# Altium PCB Controlador de velocidad - Placa fuente.PcbDoc
Units mil, origin at the board's own origin, x right, y up, seen from the top; angles counter-clockwise.
Board outline 3356.49 x 1466.72 mil, 2 copper layers (Top Layer, Bottom Layer); 28 components, 19 nets, 81 pads, 4 vias.
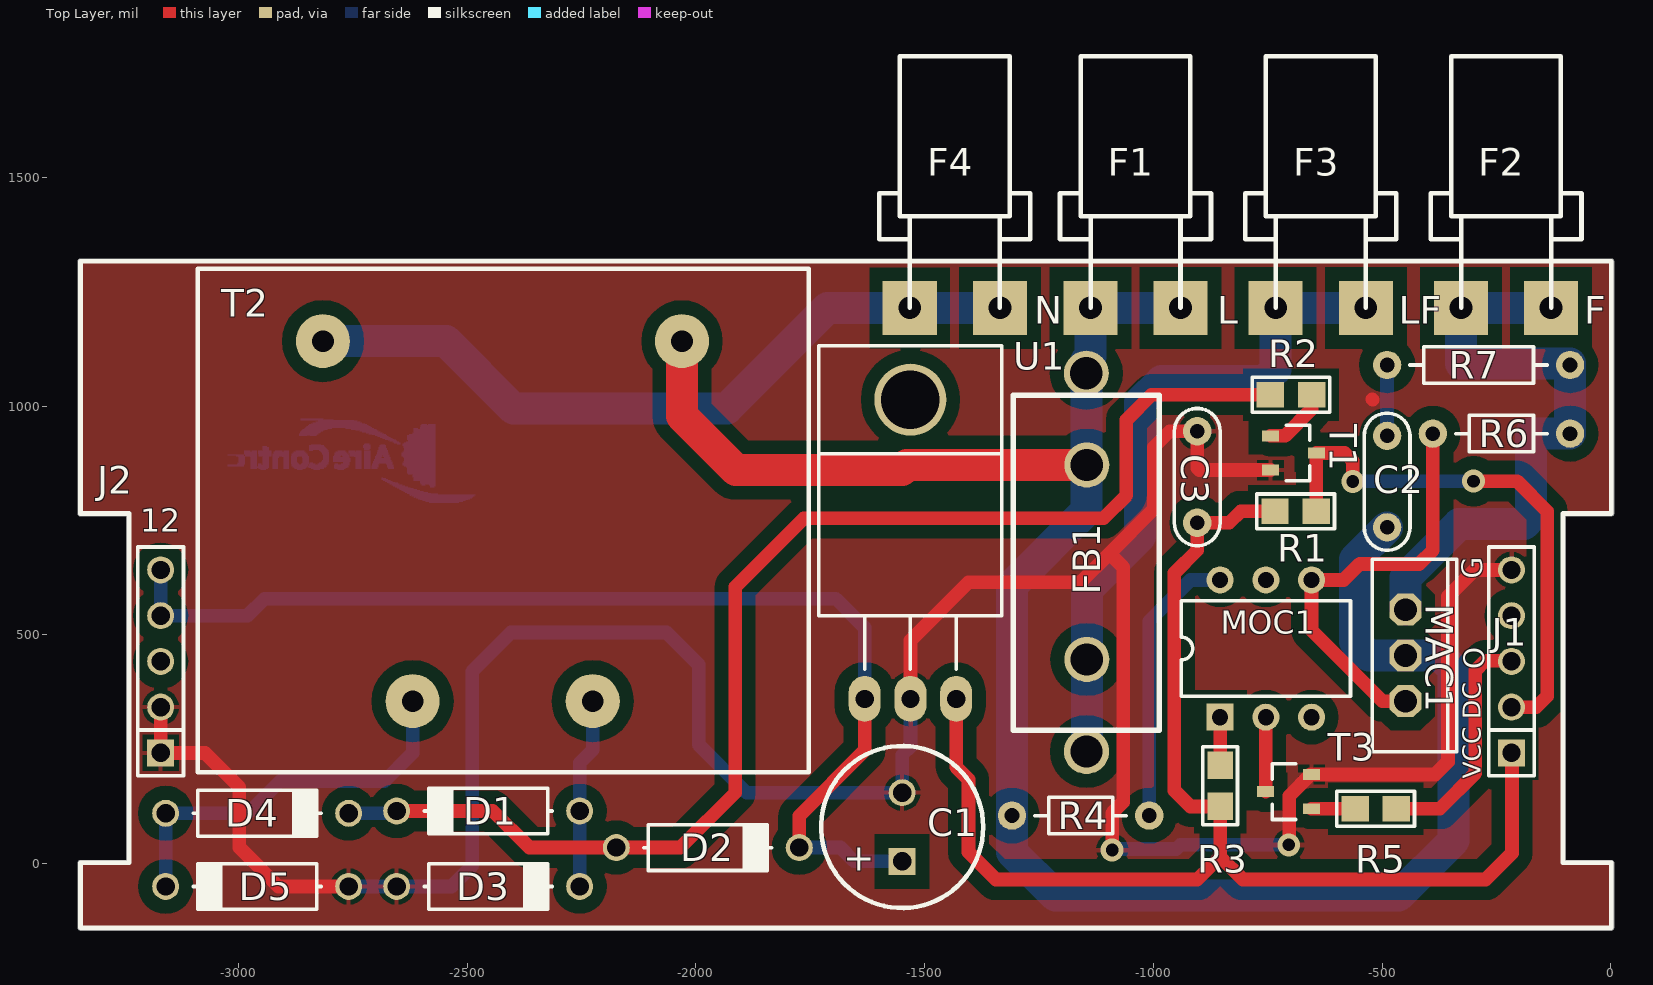
[diagram p0: Top Layer view]
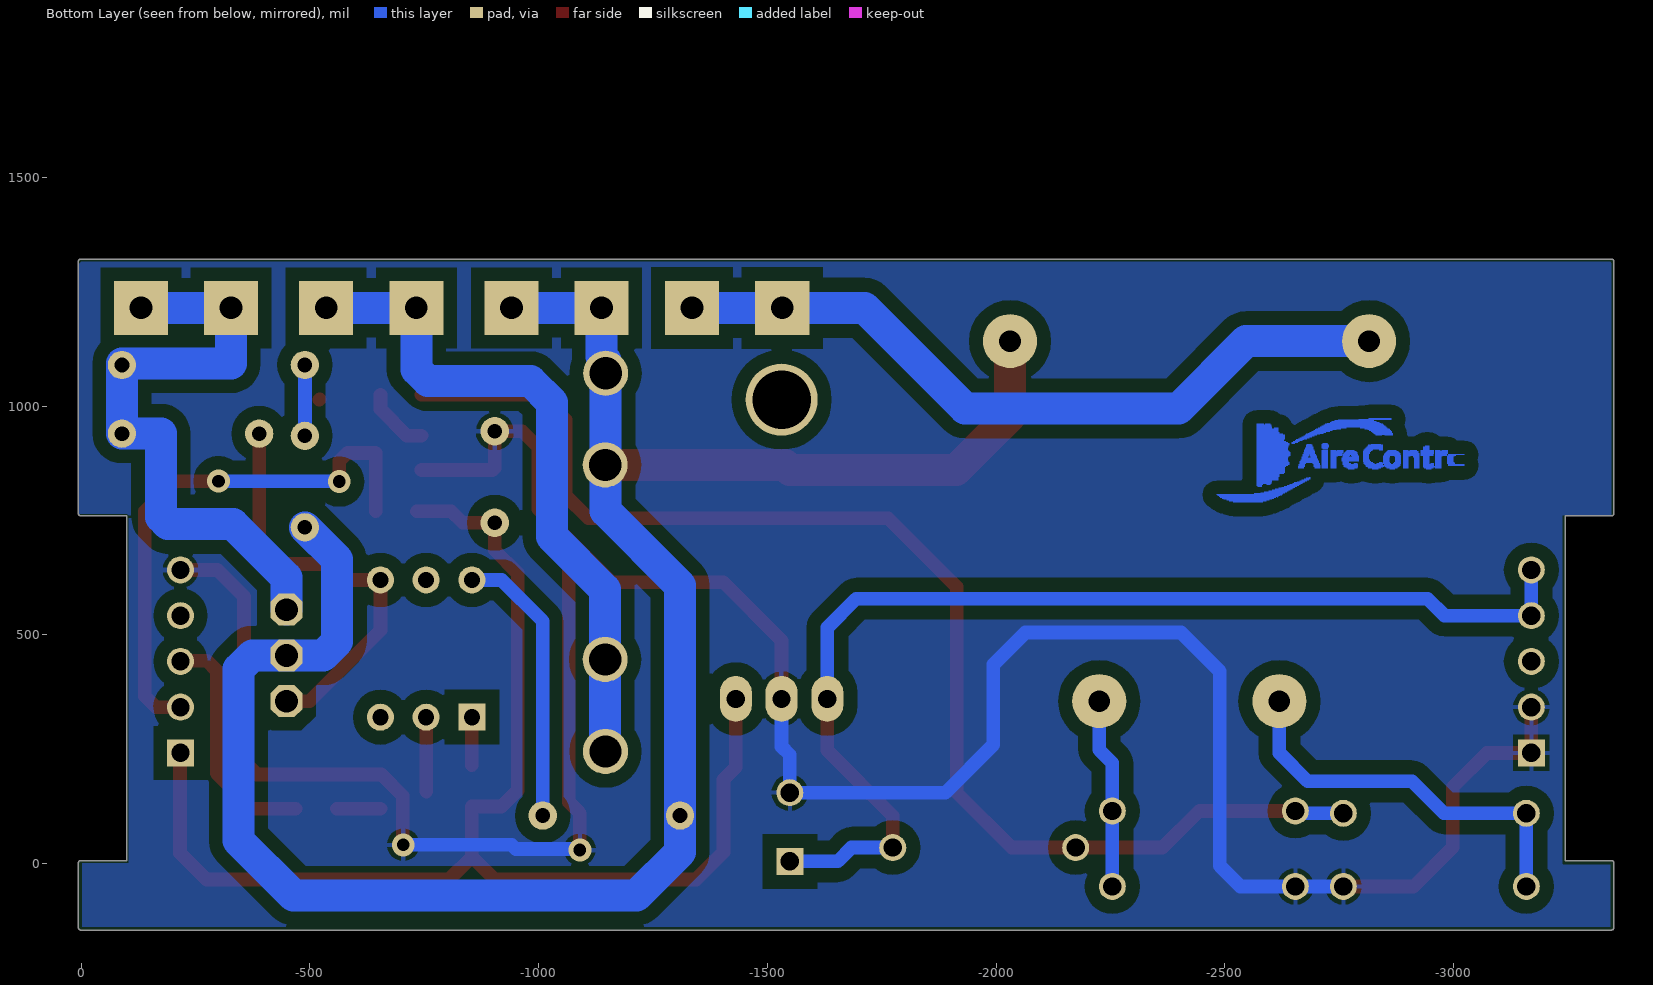
[diagram p1: Bottom Layer view, seen from below]

## Layer stack, top to bottom
Top Solder: solder mask 0.4, Solder Resist, Dk 3.5
Top Layer: signal copper 1.4
Dielectric 1: dielectric 12.6, FR-4, Dk 4.8
Bottom Layer: signal copper 1.4
Bottom Solder: solder mask 0.4, Solder Resist, Dk 3.5

## Board outline
-3345.25,-145.22 cw(c-3345.25,-140.21) -3350.26,-140.21 -3350.26,1.52 cw(c-3345.25,1.52) -3345.25,6.54 -3243.96,6.54 -3243.96,760.29 -3345.25,760.29 cw(c-3345.25,765.3) -3350.26,765.3 -3350.26,1316.48 cw(c-3345.25,1316.48) -3345.25,1321.5 1.21,1321.5 cw(c1.21,1316.48) 6.22,1316.48 6.22,765.3 cw(c1.21,765.3) 1.21,760.29 -100.08,760.29 -100.08,6.54 1.21,6.54 cw(c1.21,1.52) 6.22,1.52 6.22,-140.21 cw(c1.21,-140.21) 1.21,-145.22

## Design rules (kind name [scope] priority, off if disabled: settings)
Clearance GND [InPolygon] p1: gap=30
Clearance Clearance_1 [All] p2: gap=15
PolygonConnect [All] p1: connectstyle=Relief reliefconductorwidth=10 reliefentries=4 polygonreliefangle="90 Angle" airgapwidth=10
RoutingVias [All] p1: holewidth=28 width=50 viastyle="Through Hole" minholewidth=28 minwidth=50 maxholewidth=28 maxwidth=50
SolderMaskExpansion [All] p1: expansion=4
Width 220V [InNet('L','220V','N','NetF3_1','NetF2_1')] p1: maxlimit=70 minlimit=70 preferedwidth=70 minimp=50.000000 maximp=50.000000 favimp=50.000000
Width Width_1 [All] p2: maxlimit=30 minlimit=30 preferedwidth=30 minimp=50.000000 maximp=50.000000 favimp=50.000000
30 further rules are at their usual default settings.

## Components (designator, comment, footprint, x,y, rotation, side; value= is the part's Value field where it differs from the comment)
C1 "1000uF/25V" CAP300RP -1549,80 r90 top
C2 "0.01uF" CAP200 -489,835 r90 top
C3 "CAP" CAP200 -904,845 r270 top
D1 "DIODO" DO41 -2454,115 r180 top
D2 "DIODO" DO41 -1974,35 r0 top
D3 "DIODO" DO41 -2454,-50 r0 top
D4 "DIODO" DO41 -2959,110 r0 top
D5 "DIODO" DO41 -2959,-50 r180 top
F1 "Faston" Faston_V -1039,1415 r0 top (schematic designator F11)
F2 "Faston" Faston_V -229,1415 r0 top (schematic designator F11)
F3 "L" Faston_V -634,1415 r0 top (schematic designator F11)
F4 "N" Faston_V -1434,1415 r0 top (schematic designator F11)
FB1 "Fusible" Porta_fuse_2 -1146,245 r90 top
J1 "CON5" SIP5 -217,242 r90 top
J2 "CON5" SIP5 -3170,242 r90 top
MAC1 "MAC8x" TO-220_vert -449,555 r270 top (schematic designator MAC3)
MOC1 "MOC3023" 4N33 -854,320 r0 top (schematic designator MOC3)
R1 "10K" 0805 -689,770 r180 top
R2 "10K" 0805 -699,1025 r0 top
R3 "220" 0805 -854,170 r270 top
R4 "1k" RES300 -1309,105 r0 top
R5 "10k" 0805 -514,120 r180 top
R6 "220" RES300 -89,940 r180 top
R7 "120" RES400 -489,1090 r0 top
T1 "TRANSISTOR NPN" SOT23 -744,935 r270 top
T2 "UC30D-2-120018" Trafo_220_12_1 -1753,1300 r180 top (schematic designator T1)
T3 "TRANSISTOR NPN" SOT23 -654,120 r90 top (schematic designator T2)
U1 "7805" "TO-220 H" -1531,660 r0 top

## Footprints (in the part's own frame and the unit in brackets; to place one, negate y for a bottom-side part, rotate by r counter-clockwise, add the part's x,y. Pads: shape width x height; smd on the part's side, far side on the other; paste and mask are expansions set on the pad)
4N33 [mm]
  rect 1.5x1.5 hole 0.9: 1(0,0)
  round 1.5 hole 0.9: 2(2.54,0) 3(5.08,0) 4(5.08,7.62) 5(2.54,7.62) 6(0,7.62)
  silkscreen extent -2.16,1.16 7.24,6.46
0805 [mil] "Pasivo 0805"
  rect 60x56 smd: 1(-45,0) 2(45,0)
  silkscreen extent -85,-38 85,38, body extent -40,-25 39,25, height 15
CAP200 [mil]
  round 62 hole 32: 1(-100,0) 2(100,0)
  silkscreen extent -150,-50 150,50, body extent -110,-46 110,44, height 246
CAP300RP [mm]
  rect 1.5x1.5 hole 1.016: 1(-1.905,0)
  round 1.5 hole 1.016: 2(1.905,0)
  silkscreen extent -4.5,-4.5 4.5,4.5
DO41 [mm]
  round 1.5 hole 1.016: 1(-5.08,0) 2(5.08,0)
  silkscreen extent -3.56,-1.27 3.56,1.27, body extent -5.46,-1.19 5.46,1.37, height 2.03
Faston_V [mm]
  round 1.651 on Top Overlay: 0(0,6.223)
  rect 3x3 hole 1.27: 1(-2.501,-5.08) 2(2.501,-5.08)
  silkscreen extent -4.19,-5.08 4.19,8.89
Porta_fuse_2 [mm] "10"
  round 2.5 hole 1.8: 1(0.003,0.002) 2(21.003,0.012) 3(15.91,-0.02) 4(5.11,-0.02)
  silkscreen extent 1.19,-4.03 19.79,4.07
RES300 [mil]
  round 62 hole 32: 1(0,0) 2(300,0)
  silkscreen extent 50,-40 250,40, body extent -10,-38 310,38, height 79
RES400 [mil]
  round 62 hole 32: 1(0,0) 2(400,0)
  silkscreen extent 50,-40 350,40, body extent -12,-45 412,46, height 96
SIP5 [mm]
  rect 1.5x1.5 hole 1.016: 1(0,0)
  round 1.5 hole 1.016: 2(2.54,0) 3(5.08,0) 4(7.62,0) 5(10.16,0)
  silkscreen extent -1.27,-1.27 11.43,1.27, body extent -1.27,-1.27 11.43,1.27, height 8.38
SOT23 [mm]
  rect 0.6x0.95 smd: 1(0,0) 2(0.95,2.55) 3(1.9,0)
  silkscreen extent -0.6,0.87 2.5,2.17, body extent -0.53,-0.25 2.47,2.88, height 1
"TO-220 H" [mil]
  oval 70x100 hole 40: 1(-100,-300) 2(0,-300) 3(100,-300)
  round 157.48 hole 127.95: 4(0,354.33)
  silkscreen extent -200,-235 200,472, body extent -200,-308 200,452, height 175
TO-220_vert [mil]
  oct 70x70 hole 50: 1(0,0) 2(100,0) 3(200,0)
  silkscreen extent -111,-73 311,112
Trafo_220_12_1 [mm]
  round 3 hole 1.2: 1(26.98,4.01) 5(7.045,4.01) 7(12,24) 9(22,24)
  round 3 on Top Overlay: 6(7.02,23.95) 10(26.98,23.95)
  silkscreen extent 0.01,-0.02 33.92,27.95

## Part data
C1: library part CAPPOL
C2: library part CAP
F1 F2 F3 F4: library part FastonX1
FB1: library part Porta_fuse_1
R1 R2 R3 R4 R5 R6 R7: library part RES
T2: library part TRAFO_220_12_1
U1: library part 78XX, "REGULDOR POSITIVO"

## Via types
v1: diameter 50, hole 28, Top Layer to Bottom Layer, 4 vias

## Nets (pads, with @x,y where several pads share a name; then routed paths per layer and width w, separated by ;. In a path a pad name is that pad's centre, name@x,y a point inside that pad or via, vN(x,y) a via of type N, cw(c..) or ccw(c..) an arc to the next point about the centre after c; other vN are vias at no path point)
12V: C1.1 D2.2 J2.4 J2.5 U1.1 | length 2458.1
  Top Layer w30: D2.2 -1774,104 -1631,247 U1.1
  Bottom Layer w30: J2.5 J2.4 -2980,542 -2943,579 -1694,579 -1631,516 U1.1 ; D2.2 -1684,35 -1654,5 C1.1
DC0: J1.2 R1.1 T1.2 | length 1226.5
  Top Layer w30: R1.1@-643.61,770.39 T1.2 -581.6,897.6 -564,880 v1(-564,835) ; v1(-300,836) -205,836 -139,770 -139,366 -163,342 J1.2
  Bottom Layer w30: v1(-564,835) -559,840 -555,836 v1(-300,836) ; J1.2@-216,330 J1.2@-202.3,343.7
GND: C1.2 C3.1 D3.1 D5.1 J1.5 J2.1 J2.2 T1.3 T3.3 U1.2 | length 6191
  Top Layer w30: J2.2 J2.1 -3073,242 -2998,167 -2998,35 -2913,-50 D5.1 ; U1.2 -1531,488 -1404,615 -1159.15,615 -1096.07,678.07 ; v1(-1090,30) -1090,110.27 -1066,134.27 -1066,648 -1096.07,678.07 ; T1.3 -899.2,860.2 -904,865 C3.1 -964,945 -999,910 -999,775.15 -1096.07,678.07 ; v1@-703,41 -703,148 -656.2,194.8 T3.3 -384.2,194.8 -356,223 -356,584 -298,642 J1.5 ; -521.48,1015 -520.48,1014
  Bottom Layer w30: D5.1 D3.1 -2534,-50 -2489,-5 -2489,420 -2404,505 -2064,505 -1994,435 -1994,260 -1889,155 C1.2 -1549,238 -1531,256 U1.2 ; v1@-1087,32 -950,32 -941,41 v1(-704,41)
L: C2.1 F1.1 F1.2 FB1.2 FB1.3 MAC1.2 R4.1 T2.5 | length 4480.4
  Top Layer w70: T2.5 -2030.38,978.38 -1912.59,860.59 -1549.46,860.59 -1538.68,871.38 FB1.3@-1173.21,871.38
  Bottom Layer w70: F1.2 F1.1 -1137.46,1108.89 -1146.48,1099.88 -1146.48,770.52 -1309,608 -1309,25 -1214,-70 -464,-70 -344,50 -344,425 -374,455 MAC1.2 -529,455 -559.47,485.47 -559.47,664.53 C2.1
N: F4.1 F4.2 T2.1 | length 1631.7
  Bottom Layer w70: T2.1 -2546.13,1142.13 -2399,995 -1932.46,995 -1712.46,1215 F4.2
NetC2_2: C2.2 R7.1 | length 155
  Bottom Layer w30: C2.2 R7.1
NetD1_1: D1.1 D3.2 T2.7 | length 416.9
  Bottom Layer w30: D3.2 D1.1 -2254,220 -2225.44,248.56 T2.7
NetD1_2: D1.2 D2.1 D4.2 R2.1 | length 2818.5
  Top Layer w30: D1.2 -2444,115 -2364,35 D2.1 -2034,35 -1914,155 -1914,605 -1764,755 -1109,755 -1059,805 -1059,970 -1004,1025 R2.1
  Bottom Layer w30: D4.2 D1.2@-2654,110
NetD4_1: D4.1 D5.2 T2.9 | length 867.7
  Bottom Layer w30: D5.2 D4.1 -2979,110 -2909,180 -2681,180 -2619.14,241.86 T2.9
NetF2_1: F2.1 F2.2 MAC1.1 R6.1 R7.2 | length 1377.5
  Bottom Layer w70: MAC1.1 -449,625 -332,742 -190,742 -174,758 -174,940 R6.1 -89,1093.46 -327.46,1093.46 F2.1 F2.2
NetF3_1: F3.1 F3.2 FB1.1 FB1.4 | length 1468.1
  Bottom Layer w70: FB1.4 -1145.21,598.79 -1029,715 -1029,1008 -982.5,1054.5 -758.5,1054.5 -732.46,1080.54 F3.1 F3.2 ; FB1.1@-1145.09,247.11 FB1.4@-1145.09,447.31
NetMAC1_3: MAC1.3 MOC1.4 R6.2 | length 926.1
  Top Layer w30: MAC1.3 -499,355 -654,510 MOC1.4 -584,620 -549,655 -419,655 -389,685 R6.2
NetMOC1_1: MOC1.1 R3.1 | length 105
  Top Layer w30: R3.1 MOC1.1
NetMOC1_2: MOC1.2 T3.2 | length 162.8
  Top Layer w30: T3.2 -754.39,319.61 MOC1.2
NetMOC1_6: MOC1.6 R4.2 | length 617.3
  Bottom Layer w30: R4.2 -1009,530 -919,620 MOC1.6
NetR2_2: R2.2 T1.1 | length 145.8
  Top Layer w30: T1.1 -712.36,935 -654,993.36 R2.2
NetR5_2: R5.2 T3.1 | length 95
  Top Layer w30: T3.1 R5.2
OPTO: J1.3 R5.1 | length 524
  Top Layer w30: R5.1 -374,120 -296,198 -296,422 -274.3,443.7 -229.7,443.7 J1.3@-216,430
VCC: C3.2 J1.1 R1.2 R3.2 U1.3 | length 2855.7
  Top Layer w30: U1.3 -1431,211 -1404,184 -1404,25 -1344,-35 -904,-35 -854,15 ; R1.2 -809,770 -834,745 C3.2 -904,685 -954,635 -954,160 -919,125 R3.2 -854,15 ; J1.1@-216,243.7 -216,23 -274,-35 -804,-35 -854,15
pads on no net: F1.0 F2.0 F3.0 F4.0 J1.4 J2.3 MOC1.3 MOC1.5 T2.6 T2.10 U1.4
copper on no net: | length 23262
  Bottom Layer w1: -3023,870 -2988,870 ; -3023,871 -2988,871 ; -3023,872 -2988,872 ; -3023,894 -2988,894 ; -3005,892 -2988,892 ; -3005,893 -2988,893 ; -3003,873 -2988,873 ; -3003,874 -2986,874 ; -3001,875 -2986,875 ; -3001,876 -2986,876 ; -3001,890 -2986,890 ; -3001,891 -2988,891 ; -2999,877 -2986,877 ; -2999,878 -2986,878 ; -2999,879 -2986,879 ; -2999,880 -2986,880 ; -2999,881 -2986,881 ; -2999,882 -2986,882 ; -2999,883 -2986,883 ; -2999,884 -2986,884 ; -2999,885 -2986,885 ; -2999,886 -2986,886 ; -2999,887 -2986,887 ; -2999,888 -2986,888 ; -2999,889 -2986,889 ; -2987,896 -2960,896 ; -2987,897 -2960,897 ; -2987,898 -2960,898 ; -2987,899 -2960,899 ; -2987,900 -2960,900 ; -2987,901 -2974,901 ; -2987,902 -2974,902 ; -2985,892 -2960,892 ; -2985,893 -2960,893 ; -2985,894 -2960,894 ; -2985,895 -2960,895 ; -2975,890 -2960,890 ; -2975,891 -2960,891 ; -2973,864 -2960,864 ; -2973,865 -2960,865 ; -2973,866 -2960,866 ; -2973,867 -2960,867 ; -2973,868 -2960,868 ; -2973,869 -2960,869 ; -2973,870 -2960,870 ; -2973,871 -2960,871 ; -2973,872 -2960,872 ; -2973,873 -2960,873 ; -2973,874 -2960,874 ; -2973,875 -2960,875 ; -2973,876 -2960,876 ; -2973,877 -2960,877 ; -2973,878 -2960,878 ; -2973,879 -2960,879 ; -2973,880 -2960,880 ; -2973,881 -2960,881 ; -2973,882 -2960,882 ; -2973,883 -2960,883 ; -2973,884 -2960,884 ; -2973,885 -2960,885 ; -2973,886 -2960,886 ; -2973,887 -2960,887 ; -2973,888 -2960,888 ; -2973,889 -2960,889 ; -2971,901 -2960,901 ; -2971,902 -2960,902 ; -2959,866 -2934,866 ; -2959,867 -2934,867 ; -2959,868 -2934,868 ; -2957,869 -2934,869 ; -2957,870 -2934,870 ; -2957,871 -2934,871 ; -2957,872 -2934,872 ; -2957,873 -2950,873 ; -2957,874 -2950,874 ; -2957,896 -2928,896 ; -2957,897 -2928,897 ; -2957,898 -2928,898 ; -2957,899 -2928,899 ; -2957,900 -2928,900 ; -2957,901 -2928,901 ; -2957,902 -2928,902 ; -2955,864 -2936,864 ; -2955,865 -2936,865 ; -2955,892 -2928,892 ; -2955,893 -2928,893 ; -2955,894 -2928,894 ; -2955,895 -2928,895 ; -2951,862 -2940,862 ; -2951,863 -2940,863 ; -2947,873 -2934,873 ; -2947,874 -2934,874 ; -2947,875 -2934,875 ; -2947,876 -2934,876 ; -2947,877 -2934,877 ; -2947,878 -2934,878 ; -2947,879 -2934,879 ; -2947,880 -2934,880 ; -2947,881 -2934,881 ; -2947,882 -2934,882 ; -2947,883 -2934,883 ; -2947,884 -2934,884 ; -2947,885 -2934,885 ; -2947,886 -2934,886 ; -2947,887 -2934,887 ; -2947,888 -2934,888 ; -2947,889 -2934,889 ; -2947,890 -2934,890 ; -2947,891 -2934,891 ; -2947,903 -2934,903 ; -2947,904 -2934,904 ; -2947,905 -2934,905 ; -2947,906 -2934,906 ; -2947,907 -2934,907 ; -2947,908 -2934,908 ; -2947,909 -2934,909 ; -2947,910 -2934,910 ; -2947,911 -2938,911 ; -2947,912 -2938,912 ; -2925,864 -2914,864 ; -2925,865 -2914,865 ; -2925,866 -2914,866 ; -2925,867 -2914,867 ; -2925,868 -2914,868 ; -2925,869 -2914,869 ; -2925,870 -2914,870 ; -2925,871 -2914,871 ; -2925,872 -2914,872 ; -2925,873 -2914,873 ; -2925,874 -2914,874 ; -2925,875 -2914,875 ; -2925,876 -2914,876 ; -2925,877 -2914,877 ; -2925,878 -2914,878 ; -2925,879 -2914,879 ; -2925,880 -2914,880 ; -2925,881 -2914,881 ; -2925,882 -2914,882 ; -2925,883 -2914,883 ; -2925,884 -2914,884 ; -2925,885 -2914,885 ; -2925,886 -2914,886 ; -2925,887 -2914,887 ; -2925,888 -2912,888 ; -2925,889 -2912,889 ; -2925,890 -2912,890 ; -2925,891 -2912,891 ; -2925,892 -2890,892 ; -2925,893 -2890,893 ; -2925,894 -2890,894 ; -2925,895 -2890,895 ; -2925,896 -2890,896 ; -2923,897 -2890,897 ; -2923,898 -2890,898 ; -2923,899 -2890,899 ; -2923,900 -2890,900 ; -2919,901 -2904,901 ; -2919,902 -2904,902 ; -2905,890 -2890,890 ; -2905,891 -2890,891 ; -2901,864 -2890,864 ; -2901,865 -2890,865 ; -2901,866 -2890,866 ; -2901,867 -2890,867 ; -2901,868 -2890,868 ; -2901,869 -2890,869 ; -2901,870 -2890,870 ; -2901,871 -2890,871 ; -2901,872 -2890,872 ; -2901,873 -2890,873 ; -2901,874 -2890,874 ; -2901,875 -2890,875 ; -2901,876 -2890,876 ; -2901,877 -2890,877 ; -2901,878 -2890,878 ; -2901,879 -2890,879 ; -2901,880 -2890,880 ; -2901,881 -2890,881 ; -2901,882 -2890,882 ; -2901,883 -2890,883 ; -2901,884 -2890,884 ; -2901,885 -2890,885 ; -2901,886 -2890,886 ; -2901,887 -2890,887 ; -2901,888 -2890,888 ; -2901,889 -2890,889 ; -2901,901 -2890,901 ; -2901,902 -2890,902 ; -2885,874 -2868,874 ; -2885,875 -2870,875 ; -2885,876 -2870,876 ; -2885,877 -2872,877 ; -2885,878 -2872,878 ; -2885,879 -2872,879 ; -2885,880 -2872,880 ; -2885,881 -2872,881 ; -2885,882 -2872,882 ; -2885,883 -2872,883 ; -2885,884 -2872,884 ; -2885,885 -2872,885 ; -2885,886 -2872,886 ; -2885,887 -2872,887 ; -2885,888 -2872,888 ; -2885,889 -2872,889 ; -2885,890 -2870,890 ; -2885,891 -2870,891 ; -2885,892 -2866,892 ; -2883,870 -2848,870 ; -2883,871 -2848,871 ; -2883,872 -2848,872 ; -2883,873 -2868,873 ; -2883,893 -2866,893 ; -2883,894 -2848,894 ; -2883,895 -2850,895 ; -2883,896 -2850,896 ; -2881,868 -2850,868 ; -2881,869 -2850,869 ; -2881,897 -2852,897 ; -2881,898 -2852,898 ; -2879,866 -2852,866 ; -2879,867 -2852,867 ; -2879,899 -2854,899 ; -2879,900 -2854,900 ; -2877,864 -2854,864 ; -2877,865 -2854,865 ; -2875,901 -2856,901 ; -2875,902 -2856,902 ; -2871,862 -2860,862 ; -2871,863 -2860,863 ; -2867,936 -2850,936 ; -2867,937 -2830,937 ; -2867,938 -2828,938 ; -2867,939 -2828,939 ; -2867,940 -2826,940 ; -2865,892 -2848,892 ; -2865,893 -2848,893 ; -2865,941 -2826,941 ; -2865,942 -2823,942 ; -2865,943 -2822,943 ; -2865,944 -2820,944 ; -2863.38,970 -2792.38,970 ; -2863.38,971 -2814.38,971 ; -2863.38,972 -2814.38,972 ; -2863,873 -2848,873 ; -2863,874 -2846,874 ; -2863,945 -2820,945 ; -2863,946 -2816,946 ; -2861,875 -2846,875 ; -2861,876 -2846,876 ; -2861,888 -2846,888 ; -2861,889 -2846,889 ; -2861,890 -2846,890 ; -2861,891 -2848,891 ; -2861,947 -2816,947 ; -2861,948 -2812,948 ; -2859,877 -2846,877 ; -2859,878 -2846,878 ; -2859,879 -2846,879 ; -2859,880 -2846,880 ; -2859,881 -2846,881 ; -2859,882 -2846,882 ; -2859,883 -2846,883 ; -2859,884 -2846,884 ; -2859,885 -2846,885 ; -2859,886 -2846,886 ; -2859,887 -2846,887 ; -2859,949 -2812,949 ; -2859,950 -2806,950 ; -2855,951 -2806,951 ; -2855,952 -2796,952 ; -2853,953 -2796,953 ; -2853,954 -2708,954 ; -2851,955 -2712,955 ; -2851,956 -2712,956 ; -2847,868 -2809,868 ; -2847,869 -2808,869 ; -2847,870 -2808,870 ; -2847,957 -2716,957 ; -2847,958 -2716,958 ; -2845,866 -2812,866 ; -2845,867 -2812,867 ; -2845,871 -2808,871 ; -2845,872 -2806,872 ; -2845,873 -2832,873 ; -2845,874 -2832,874 ; -2845,904 -2838,904 ; -2845,905 -2838,905 ; -2845,906 -2806,906 ; -2845,907 -2808,907 ; -2845,908 -2808,908 ; -2845,909 -2810,909 ; -2845,910 -2810,910 ; -2845,911 -2812,911 ; -2845,912 -2812,912 ; -2845,913 -2814,913 ; -2845,914 -2814,914 ; -2845,959 -2720,959 ; -2845,960 -2720,960 ; -2844,875 -2838,875 ; -2844,876 -2838,876 ; -2843,936 -2840,936 ; -2841,864 -2814,864 ; -2841,865 -2814,865 ; -2841,915 -2820,915 ; -2841,916 -2820,916 ; -2841,961 -2724,961 ; -2841,962 -2724,962 ; -2839,936 -2830,936 ; -2837,963 -2730,963 ; -2837,964 -2730,964 ; -2835,862 -2822,862 ; -2835,863 -2822,863 ; -2831,965 -2734,965 ; -2831,966 -2734,966 ; -2827,873 -2806,873 ; -2827,874 -2804,874 ; -2825,967 -2740,967 ; -2825,968 -2740,968 ; -2823,875 -2804,875 ; -2823,876 -2804,876 ; -2823,904 -2804,904 ; -2823,905 -2806,905 ; -2821,902 -2804,902 ; -2821,903 -2804,903 ; -2819,877 -2804,877 ; -2819,878 -2802,878 ; -2819,900 -2802,900 ; -2819,901 -2804,901 ; -2819,969 -2748,969 ; -2817,879 -2802,879 ; -2817,880 -2802,880 ; -2817,881 -2802,881 ; -2817,882 -2802,882 ; -2817,896 -2802,896 ; -2817,897 -2802,897 ; -2817,898 -2802,898 ; -2817,899 -2802,899 ; -2815,883 -2802,883 ; -2815,884 -2802,884 ; -2815,885 -2802,885 ; -2815,886 -2802,886 ; -2815,887 -2802,887 ; -2815,888 -2802,888 ; -2815,889 -2802,889 ; -2815,890 -2802,890 ; -2815,891 -2802,891 ; -2815,892 -2802,892 ; -2815,893 -2802,893 ; -2815,894 -2802,894 ; -2815,895 -2802,895 ; -2793,880 -2756,880 ; -2793,881 -2756,881 ; -2793,882 -2756,882 ; -2793,883 -2756,883 ; -2793,884 -2756,884 ; -2793,885 -2756,885 ; -2793,886 -2756,886 ; -2793,887 -2758,887 ; -2793,888 -2758,888 ; -2793,889 -2780,889 ; -2793,890 -2778,890 ; -2791,866 -2762,866 ; -2791,867 -2762,867 ; -2791,868 -2760,868 ; -2791,869 -2760,869 ; -2791,870 -2760,870 ; -2791,871 -2760,871 ; -2791,872 -2758,872 ; -2791,891 -2778,891 ; -2791,892 -2776,892 ; -2791,893 -2776,893 ; -2791,894 -2759,894 ; -2789,864 -2766,864 ; -2789,865 -2766,865 ; -2789,873 -2782,873 ; -2789,874 -2783,874 ; -2789,895 -2760,895 ; -2789,896 -2760,896 ; -2789,897 -2762,897 ; -2789,898 -2762,898 ; -2787,899 -2764,899 ; -2787,900 -2764,900 ; -2783,862 -2770,862 ; -2783,863 -2770,863 ; -2783,901 -2766,901 ; -2783,902 -2766,902 ; -2775,873 -2758,873 ; -2775,874 -2758,874 ; -2773,892 -2758,892 ; -2773,893 -2758,893 ; -2771,875 -2758,875 ; -2771,876 -2758,876 ; -2771,877 -2758,877 ; -2771,878 -2758,878 ; -2771,890 -2758,890 ; -2771,891 -2758,891 ; -2769,879 -2758,879 ; -2769,889 -2758,889 ; -2765,952 -2704,952 ; -2765,953 -2708,953 ; -2759,898 -2732,898 ; -2759,899 -2732,899 ; -2759,900 -2732,900 ; -2759,901 -2746,901 ; -2759,902 -2746,902 ; -2757,894 -2732,894 ; -2757,895 -2732,895 ; -2757,896 -2732,896 ; -2757,897 -2732,897 ; -2755,892 -2732,892 ; -2755,893 -2732,893 ; -2753,950 -2701,950 ; -2753,951 -2704,951 ; -2747,890 -2732,890 ; -2747,891 -2732,891 ; -2743,864 -2732,864 ; -2743,865 -2732,865 ; -2743,866 -2732,866 ; -2743,867 -2732,867 ; -2743,868 -2732,868 ; -2743,869 -2732,869 ; -2743,870 -2732,870 ; -2743,871 -2732,871 ; -2743,872 -2732,872 ; -2743,873 -2732,873 ; -2743,874 -2732,874 ; -2743,875 -2732,875 ; -2743,876 -2732,876 ; -2743,877 -2732,877 ; -2743,878 -2732,878 ; -2743,879 -2732,879 ; -2743,880 -2732,880 ; -2743,881 -2732,881 ; -2743,882 -2732,882 ; -2743,883 -2732,883 ; -2743,884 -2732,884 ; -2743,885 -2732,885 ; -2743,886 -2732,886 ; -2743,887 -2732,887 ; -2743,888 -2732,888 ; -2743,889 -2732,889 ; -2743,901 -2732,901 ; -2743,902 -2732,902 ; -2743,948 -2698,948 ; -2743,949 -2700,949 ; -2735,946 -2694,946 ; -2735,947 -2698,947 ; -2729,944 -2690,944 ; -2729,945 -2694,945 ; -2727,910 -2712,910 ; -2727,911 -2712,911 ; -2727,912 -2712,912 ; -2727,913 -2712,913 ; -2727,914 -2712,914 ; -2725,864 -2712,864 ; -2725,865 -2712,865 ; -2725,866 -2712,866 ; -2725,867 -2712,867 ; -2725,868 -2712,868 ; -2725,869 -2712,869 ; -2725,870 -2712,870 ; -2725,871 -2712,871 ; -2725,872 -2712,872 ; -2725,873 -2712,873 ; -2725,874 -2712,874 ; -2725,875 -2712,875 ; -2725,876 -2712,876 ; -2725,877 -2712,877 ; -2725,878 -2712,878 ; -2725,879 -2712,879 ; -2725,880 -2712,880 ; -2725,881 -2712,881 ; -2725,882 -2712,882 ; -2725,883 -2712,883 ; -2725,884 -2712,884 ; -2725,885 -2712,885 ; -2725,886 -2712,886 ; -2725,887 -2712,887 ; -2725,888 -2712,888 ; -2725,889 -2712,889 ; -2725,890 -2712,890 ; -2725,891 -2712,891 ; -2725,892 -2712,892 ; -2725,893 -2712,893 ; -2725,894 -2712,894 ; -2725,895 -2712,895 ; -2725,896 -2712,896 ; -2725,897 -2712,897 ; -2725,898 -2712,898 ; -2725,899 -2712,899 ; -2725,900 -2712,900 ; -2725,901 -2712,901 ; -2725,902 -2712,902 ; -2725,906 -2714,906 ; -2725,907 -2714,907 ; -2725,908 -2712,908 ; -2725,909 -2712,909 ; -2725,915 -2712,915 ; -2725,916 -2712,916 ; -2725,917 -2714,917 ; -2724,918 -2714,918 ; -2721,942 -2686,942 ; -2721,943 -2690,943 ; -2715,940 -2682,940 ; -2715,941 -2686,941 ; -2709,864 -2696,864 ; -2709,865 -2696,865 ; -2709,866 -2696,866 ; -2709,867 -2696,867 ; -2709,868 -2694,868 ; -2709,869 -2694,869 ; -2709,870 -2694,870 ; -2707,871 -2694,871 ; -2707,872 -2694,872 ; -2707,873 -2694,873 ; -2707,874 -2692,874 ; -2707,938 -2678,938 ; -2707,939 -2682,939 ; -2705,875 -2692,875 ; -2705,876 -2664,876 ; -2705,877 -2664,877 ; -2705,878 -2664,878 ; -2705,879 -2666,879 ; -2705,880 -2666,880 ; -2703,881 -2666,881 ; -2703,882 -2666,882 ; -2703,883 -2668,883 ; -2703,884 -2668,884 ; -2701,885 -2668,885 ; -2701,886 -2668,886 ; -2701,887 -2688,887 ; -2701,888 -2688,888 ; -2701,889 -2688,889 ; -2701,890 -2686,890 ; -2701,936 -2676,936 ; -2701,937 -2678,937 ; -2699,891 -2686,891 ; -2699,892 -2686,892 ; -2699,893 -2686,893 ; -2699,894 -2686,894 ; -2697,895 -2686,895 ; -2697,896 -2672,896 ; -2697,897 -2672,897 ; -2697,898 -2672,898 ; -2697,899 -2674,899 ; -2697,900 -2674,900 ; -2695,901 -2674,901 ; -2695,902 -2674,902 ; -2695,903 -2674,903 ; -2695,904 -2674,904 ; -2695,934 -2672,934 ; -2695,935 -2676,935 ; -2693,905 -2676,905 ; -2693,906 -2676,906 ; -2693,907 -2676,907 ; -2693,908 -2676,908 ; -2693,909 -2678,909 ; -2693,910 -2678,910 ; -2691,911 -2678,911 ; -2691,912 -2678,912 ; -2691,913 -2678,913 ; -2691,914 -2678,914 ; -2690,932 -2668,932 ; -2690,933 -2672,933 ; -2689,915 -2680,915 ; -2689,916 -2680,916 ; -2687,840 -2674,840 ; -2687,841 -2678,841 ; -2687,842 -2678,842 ; -2687,843 -2684,843 ; -2687,844 -2684,844 ; -2685,930 -2664,930 ; -2685,931 -2668,931 ; -2684,895 -2672,895 ; -2683,838 -2668,838 ; -2683,839 -2674,839 ; -2683,890 -2670,890 ; -2683,891 -2670,891 ; -2683,892 -2670,892 ; -2683,893 -2670,893 ; -2683,894 -2670,894 ; -2681,887 -2668,887 ; -2681,888 -2668,888 ; -2681,889 -2670,889 ; -2679,836 -2664,836 ; -2679,837 -2668,837 ; -2679,928 -2660,928 ; -2679,929 -2664,929 ; -2677,874 -2664,874 ; -2677,875 -2664,875 ; -2675,834 -2658,834 ; -2675,835 -2664,835 ; -2675,868 -2660,868 ; -2675,869 -2662,869 ; -2675,870 -2662,870 ; -2675,871 -2662,871 ; -2675,872 -2662,872 ; -2675,873 -2664,873 ; -2673,864 -2660,864 ; -2673,865 -2660,865 ; -2673,866 -2660,866 ; -2673,867 -2660,867 ; -2673,926 -2656,926 ; -2673,927 -2660,927 ; -2671,832 -2652,832 ; -2671,833 -2658,833 ; -2669,830 -2648,830 ; -2669,831 -2652,831 ; -2669,924 -2654,924 ; -2669,925 -2656,925 ; -2665,828 -2642,828 ; -2665,829 -2648,829 ; -2663,922 -2650,922 ; -2663,923 -2654,923 ; -2661,826 -2636,826 ; -2661,827 -2642,827 ; -2659,920 -2646,920 ; -2659,921 -2650,921 ; -2657,824 -2630,824 ; -2657,825 -2636,825 ; -2653,822 -2624,822 ; -2653,823 -2630,823 ; -2653,918 -2646,918 ; -2653,919 -2646,919 ; -2649,820 -2618,820 ; -2649,821 -2624,821 ; -2647,818 -2610,818 ; -2647,819 -2618,819 ; -2643,816 -2604,816 ; -2643,817 -2610,817 ; -2643,892 -2570,892 ; -2643,893 -2570,893 ; -2643,894 -2570,894 ; -2643,895 -2570,895 ; -2643,896 -2570,896 ; -2643,897 -2570,897 ; -2643,898 -2570,898 ; -2641,872 -2570,872 ; -2641,873 -2570,873 ; -2641,874 -2570,874 ; -2641,875 -2570,875 ; -2641,876 -2570,876 ; -2641,890 -2570,890 ; -2641,891 -2570,891 ; -2641,899 -2570,899 ; -2641,900 -2570,900 ; -2641,914 -2570,914 ; -2641,915 -2570,915 ; -2641,916 -2570,916 ; -2641,917 -2570,917 ; -2641,918 -2570,918 ; -2639,814 -2596,814 ; -2639,815 -2604,815 ; -2639,877 -2570,877 ; -2639,878 -2570,878 ; -2639,879 -2570,879 ; -2639,880 -2570,880 ; -2639,888 -2570,888 ; -2639,889 -2570,889 ; -2639,901 -2570,901 ; -2639,902 -2570,902 ; -2639,910 -2570,910 ; -2639,911 -2570,911 ; -2639,912 -2570,912 ; -2639,913 -2570,913 ; -2637,870 -2570,870 ; -2637,871 -2570,871 ; -2637,881 -2570,881 ; -2637,882 -2570,882 ; -2637,883 -2570,883 ; -2637,884 -2570,884 ; -2637,886 -2570,886 ; -2637,887 -2570,887 ; -2637,903 -2570,903 ; -2637,904 -2570,904 ; -2637,906 -2570,906 ; -2637,907 -2570,907 ; -2637,908 -2570,908 ; -2637,909 -2570,909 ; -2637,919 -2570,919 ; -2637,920 -2570,920 ; -2635,812 -2586,812 ; -2635,813 -2596,813 ; -2635,885 -2570,885 ; -2635,905 -2570,905 ; -2633,868 -2570,868 ; -2633,869 -2570,869 ; -2633,921 -2570,921 ; -2633,922 -2570,922 ; -2631,810 -2578,810 ; -2631,811 -2586,811 ; -2631,854 -2570,854 ; -2631,855 -2570,855 ; -2631,856 -2570,856 ; -2631,857 -2570,857 ; -2631,858 -2570,858 ; -2631,859 -2570,859 ; -2631,860 -2570,860 ; -2631,861 -2570,861 ; -2631,862 -2570,862 ; -2631,863 -2570,863 ; -2631,864 -2570,864 ; -2631,866 -2570,866 ; -2631,867 -2570,867 ; -2631,928 -2570,928 ; -2631,929 -2570,929 ; -2631,930 -2570,930 ; -2631,931 -2570,931 ; -2631,932 -2570,932 ; -2631,933 -2570,933 ; -2631,934 -2570,934 ; -2631,935 -2570,935 ; -2631,936 -2570,936 ; -2629,852 -2570,852 ; -2629,853 -2570,853 ; -2629,865 -2570,865 ; -2629,923 -2570,923 ; -2629,924 -2570,924 ; -2629,925 -2570,925 ; -2629,926 -2570,926 ; -2629,927 -2570,927 ; -2627,808 -2564,808 ; -2627,809 -2578,809 ; -2627,937 -2570,937 ; -2627,938 -2570,938 ; -2625,806 -2482,806 ; -2624,805 -2623,805 ; -2623,807 -2564,807 ; -2621,804 -2484,804 ; -2621,805 -2484,805 ; -2619,846 -2570,846 ; -2619,847 -2570,847 ; -2619,848 -2570,848 ; -2619,849 -2570,849 ; -2619,850 -2570,850 ; -2619,851 -2570,851 ; -2619,939 -2570,939 ; -2619,940 -2570,940 ; -2619,941 -2570,941 ; -2619,942 -2570,942 ; -2617,802 -2488,802 ; -2617,803 -2488,803 ; -2617,838 -2570,838 ; -2617,839 -2570,839 ; -2617,840 -2570,840 ; -2617,841 -2570,841 ; -2617,842 -2570,842 ; -2617,843 -2570,843 ; -2617,844 -2570,844 ; -2617,845 -2570,845 ; -2617,943 -2570,943 ; -2617,944 -2570,944 ; -2617,945 -2570,945 ; -2617,946 -2570,946 ; -2617,947 -2570,947 ; -2617,948 -2570,948 ; -2617,949 -2570,949 ; -2617,950 -2570,950 ; -2617,951 -2608,951 ; -2617,952 -2608,952 ; -2616,801 -2615,801 ; -2611,800 -2490,800 ; -2611,801 -2490,801 ; -2607,798 -2494,798 ; -2607,799 -2494,799 ; -2603,796 -2498,796 ; -2603,797 -2498,797 ; -2603,834 -2570,834 ; -2603,835 -2570,835 ; -2603,836 -2570,836 ; -2603,837 -2570,837 ; -2603,951 -2570,951 ; -2603,952 -2570,952 ; -2603,953 -2570,953 ; -2603,954 -2570,954 ; -2601,830 -2586,830 ; -2601,831 -2586,831 ; -2601,832 -2570,832 ; -2601,833 -2570,833 ; -2601,955 -2570,955 ; -2601,956 -2570,956 ; -2601,957 -2570,957 ; -2601,958 -2570,958 ; -2599,828 -2592,828 ; -2599,829 -2592,829 ; -2599,959 -2588,959 ; -2599,960 -2588,960 ; -2597,794 -2504,794 ; -2597,795 -2504,795 ; -2591,792 -2510,792 ; -2591,793 -2510,793 ; -2585,830 -2570,830 ; -2585,831 -2570,831 ; -2585,959 -2570,959 ; -2585,960 -2570,960 ; -2583,790 -2518,790 ; -2583,791 -2518,791 ; -2583,828 -2570,828 ; -2583,829 -2570,829 ; -2581,824 -2572,824 ; -2581,825 -2572,825 ; -2581,826 -2570,826 ; -2581,827 -2570,827

## Polygon pours and split planes (outlines as drawn)
GND on Top Layer "Bottom Layer-No Net" (solid, remove dead copper, pour order 4): -3344,1314 -1,1314 0,1313 5.63,1307.37 5.63,763.3 -100.7,763.3 -105,759 -105,-1 -3,-1 -3,-140 -3346,-140 -3347,-141 -3344,-138 -3344,-4 -3241,-4 -3239,-2 -3239,760 -3346.84,760 -3348.17,758.67 -3346,760.84 -3346,1310
GND on Bottom Layer "Bottom Layer-No Net" (solid, remove dead copper, pour order 3): -3343,1316 0,1316 1,1315 6.63,1309.37 6.63,765.3 -99.7,765.3 -104,761 -104,1 -2,1 -2,-138 -3345,-138 -3346,-139 -3343,-136 -3343,-2 -3240,-2 -3238,0 -3238,762 -3345.84,762 -3347.17,760.67 -3345,762.84 -3345,1312

## Silkscreen, mask and mechanical layers (free items; w line width, h text height)
Top Overlay:
  lines w10: -3345.25,-140.21 -3345.25,1.52 -3238.95,1.52 -3238.95,765.3 -3345.25,765.3 -3345.25,1316.48 1.21,1316.48 1.21,765.3 -105.09,765.3 -105.09,1.52 1.21,1.52 1.21,-140.21 -3345.25,-140.21
  text "N" at -1260,1180 h60
  text "L" at -860,1180 h60
  text "LF" at -464,1180 h60
  text "F" at -57.46,1180 h60
  text "12" at -3215,725 h50
  text "G" at -281,623 h45 r90
  text "O" at -277,425 h45 r90
  text "DC" at -284,316 h40 r90
  text "VCC" at -284,186 h40 r90

## Text inside footprints (layer, text, board x,y; h text height)
C1: Top Overlay "+" at -1609,35 h60 r180